# Altium PCB VESC_JLC.PcbDoc (part 2 of 3)
Units mm, origin at the board's own origin, x right, y up, seen from the top; angles counter-clockwise.
Board outline 74.1 x 118 mm, 2 copper layers (Component Side, Bottom Layer), stack 1.571 mm thick; 178 components, 173 nets, 901 pads, 567 vias.
Unrouted connection lines stored in the file: 10.
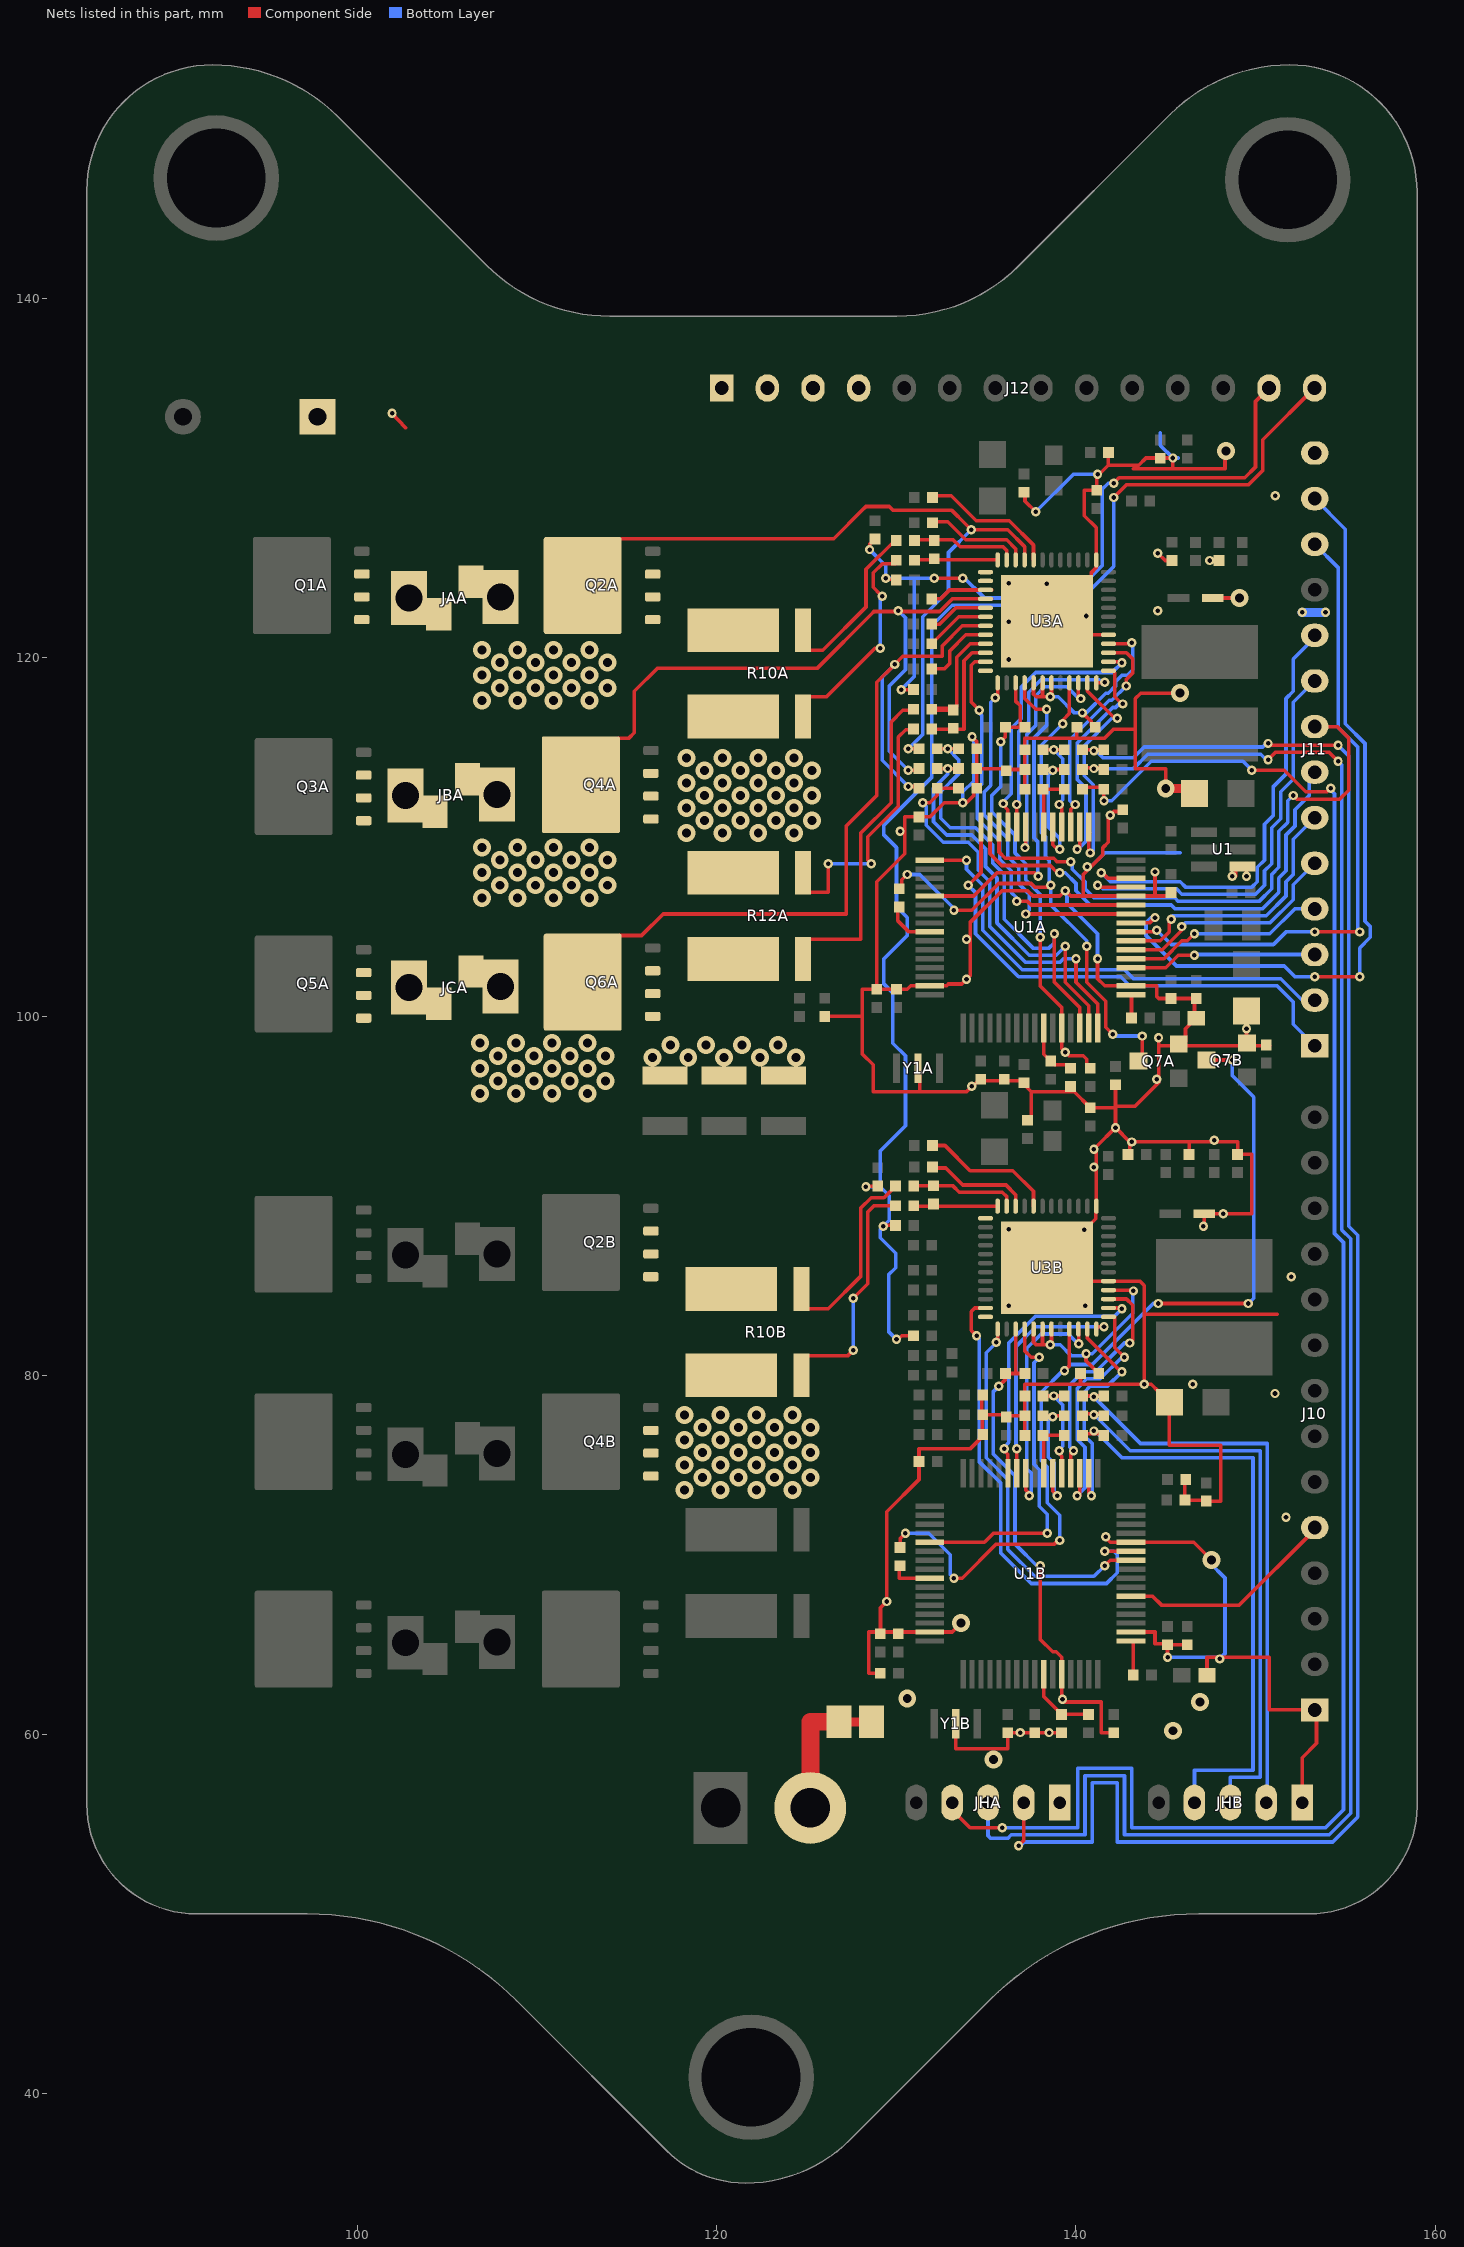
[diagram p2: the nets of this part, all layers, seen from the top]

## Via types
v1: diameter 0.52, hole 0.254, Component Side to Bottom Layer, tented both sides, 284 vias
v2: diameter 1, hole 0.5, Component Side to Bottom Layer, tented both sides, 283 vias

## Nets (pads, with @x,y where several pads share a name; then routed paths per layer and width w, separated by ;. In a path a pad name is that pad's centre, name@x,y a point inside that pad or via, vN(x,y) a via of type N, cw(c..) or ccw(c..) an arc to the next point about the centre after c; other vN are vias at no path point) (continued)
GND: C1A.2 C1B.2 C2A.2 C2B.2 C3A.2 C3B.2 C4A.2 C4B.2 C5A.2 C5B.2 C6A.2 C6B.2 C7A.2 C7B.2 C8A.2 C8B.2 C10A.2 C10B.2 C11A.2 C11B.2 C12A.1 C12B.1 C13A.1 C13B.1 C14A.1 C14B.1 C18A.2 C18B.2 C22A.1 C22B.1 C23A.1 C23B.1 C30A.2 C30B.2 C33A.2 C33B.2 C35A.1 C36A.1 C37A.1 C38A.2 C38B.2 C39.1 C40A.2 D1A.2 D1B.2 D3A.1 D3B.1 J10.1 J11.14 J12.1 J12.2 J12.3 J12.4 JB.1 JHA.1 JHB.1 pad.3 Q7A.2 Q7B.2 R6.1 R11.1 R12.1 R13.1 R20A.1 R20B.1 R22A.1 R22B.1 R24A.1 R24B.1 R33A.1 R33B.1 R36A.2 R36B.2 R40A.1 R40B.1 R41A.1 U1.1 U1A.18 U1A.28 U1A.63 U1B.18 U1B.28 U1B.63 U3A.0 U3A.1 U3A.41 U3B.0 U3B.1 U3B.41 Y1A.2 Y1B.2 | length 331.7
  Component Side w0.2: v1(101.9,133.6) 102.65,132.775 ; R11.1@126,99.992 128.092,99.992 ; C4A.2@128.9,101.708 128.9,107.5 130.46,109.06 130.46,111.108 C6A.2@131.26,111.108 131.868,111.108 132.66,111.9 v1(133.7,111.9) 133.9,111.9 134.3,112.3 R20A.1@134.3,112.532 ; C1B.2@129.092,63.4 128.46,63.4 128.46,65.7 U1B.63@131.86,65.7 133.1,65.7 133.43,66.03 133.6,65.86 v2(133.6,66.2) ; C4B.2@129.11,65.6 129.11,67.055 v1(129.455,67.4) 129.455,72.395 131.252,74.192 C6B.2@131.252,75.2 131.252,75.9 134.1,75.9 134.768,76.568 R22B.1@134.768,77.8 ; Y1A.2@131.3,96.9 131.3,95.8 ; Y1B.2@133.3,60.6 133.3,59.2 136.2,59.2 C2B.2@136.2,60.092 C3B.2@137.7,60.092 R40B.1@139.2,60.092 ; v1(133.9,102.065) 133.635,101.8 132.9,101.8 132.8,101.7 U1A.63@131.86,101.7 130.8,101.7 130.6,101.5 128.1,101.5 128.1,97.9 128.7,97.3 128.7,95.8 131.3,95.8 ; v1@134,102.1 133.935,102.1 134.1,102.265 134.1,105.223 135.877,107 137.3,107 137.6,106.7 139.1,106.7 v1(139.4,107) 139.7,106.7 140.4,106.7 ; v1(134.21,115.566) 134.468,115.308 R24A.1@134.468,114.9 R22A.1@134.468,113.8 ; R20A.1@134.468,112.7 R22A.1@134.468,113.8 ; R24B.1@134.75,78.618 134.75,77.8 C30B.2@135.984,77.8 ; C30A.2@135.984,113.8 R22A.1@134.468,113.8 ; C30B.2@136.11,77.674 136.186,77.75 C13B.1@137.152,77.75 ; C30A.2@136.11,113.674 136.186,113.75 C13A.1@137.152,113.75 ; U3B.0@136.197,83.937 138.26,86 U3B.0@138.385,86 ; U3A.0@136.197,119.937 138.26,122 U3A.0@138.385,122 ; C12B.1@137.152,76.65 C13B.1@137.152,77.75 ; C12A.1@137.152,112.65 C13A.1@137.152,113.75 ; 137.152,115.5 140.052,115.5 ; 137.16,115.5 137.152,115.492 C14A.1@137.152,114.85 C13A.1@137.152,113.75 ; C38A.2@137.16,129.092 137.16,128.7 v1(137.76,128.1) ; C38B.2@137.3,94.208 137.5,94.408 137.5,95.8 ; C23A.1@140.052,116 140.052,115.5 ; C23B.1@140.252,80.1 140.252,79.5 ; C18B.2@140.7,94.908 C18B.2@140.8,94.908 142.192,94.908 ; C18B.2@140.784,94.916 139.9,95.8 137.5,95.8 ; v1(141.2,103.2) 141.2,102.1 141.6,101.7 U1A.18@143.06,101.7 144.5,101.7 144.5,101.1 144.608,100.992 C8A.2@145.3,100.992 ; v1@141.6,71 141.9,70.7 U1B.28@143.06,70.7 146.56,70.7 v2(147.56,69.7) ; U3A.41@141.81,121.25 139.135,121.25 U3A.0@138.385,122 ; C18A.2@141.908,131.4 141.8,131.292 141.8,130.7 ; v1@142.2,93.7 v1(142.2,93.8) ; C5A.2@142.2,96.192 142.2,95 ; C11A.2@142.6,111.408 142.108,111.408 141.8,111.1 141.8,109.7 141.5,109.4 141.5,109 140.5,108 140.4,107.9 140.4,107.74 140.4,106.7 ; R33B.1@143,92.308 v1@143,93 ; U1B.18@143.06,65.7 144.4,65.7 144.4,65.05 144.952,65.05 145.1,64.902 145.1,64.44 v1@144.96,64.3 ; 143.2,116 142.1,116 141.6,115.5 140.052,115.5 ; 143.2,130.5 145.4,130.5 ; 144.4,106.8 v1(144.4,108.04) ; v1(144.56,125.8) 144.968,125.392 C22A.1@145.46,125.392 ; v1(144.6,98.8) 144.6,98.358 ; v2(145,112.7) 145,113.8 143.3,113.8 143.3,117.7 143.6,118 v2(145.8,118) ; C8B.2@145.1,64.992 R13.1@146.2,64.992 ; R41A.1@145.108,106.7 U1A.28@143.06,106.7 140.4,106.7 ; C8A.2@145.3,101.092 C8A.2@145.3,100.992 ; R41A.1@145.3,106.892 R41A.1@145.5,106.892 ; Q7A.2@145.6,98.575 146.1,98.575 146.1,99.3 146.6,99.8 146.6,100.892 146.5,100.992 C8A.2@145.3,100.992 ; C33A.2@145.9,112.7 C33A.2@146.1,112.9 ; C5B.2@146.068,74.2 C11B.2@146.068,73.05 C10B.2@147.202,73.05 ; R36B.2@146.3,92.308 146.3,93 ; C10A.2@146.692,101.1 C10A.2@146.796,100.996 ; D3B.1@146.85,89 D3B.1@147.15,89 ; v1@147.15,88.15 D3B.1@147.15,89 ; C10B.2@147.26,72.992 148.06,72.992 148.06,76.1 145.205,76.1 C33B.2@145.205,78.5 144.6,78.5 144.6,79.1 144.2,79.5 v1(143.8,79.5) ; D1B.2@147.3,63.3 147.3,64.3 147.9,64.3 v1(148,64.2) 148.1,64.3 150.76,64.3 150.76,61.36 J10.1@153.3,61.36 153.4,61.26 153.4,59.5 152.6,58.7 152.6,55.6 JHB.1@152.3,55.3 ; D3A.1@147.66,123.4 147.76,123.3 148.86,123.3 149.1,123.06 v2(149.1,123.3) ; v2@148.3,131.4 148.3,130.5 145.4,130.5 ; v1@148.9,107.8 148.9,108.4 148.85,108.35 U1.1@149.275,108.35 149.587,108.35 149.5,108.263 v1(149.5,107.8) ; C40A.2@149.5,100.305 149.5,98.5 Q7B.2@149.6,98.4 ; R12.1@150.8,98.358 144.6,98.358 ; 151.2,83.4 143.8,83.4 ; 131.3,95.8 133.9,95.8 v1(134.2,96.1) 134.25,96.1 134.55,96.4 136.9,96.4 137.5,95.8 ; C13B.1@137.152,77.75 C14B.1@137.152,78.85 137.152,79.5 140.252,79.5 ; U3B.0@138.385,86 141.1,88.715 141.1,89.39 U3B.1@141.135,89.425 141.135,92.735 v1(142.2,93.8) ; U3B.0@138.385,86 139.135,85.25 U3B.41@141.81,85.25 143.55,85.25 143.8,85 143.8,83.4 ; U3A.0@138.385,122 140.86,124.475 140.86,124.725 141.135,125 U3A.1@141.135,125.425 141.135,127.225 140.468,127.892 140.468,129.308 R33A.1@141.16,129.308 141.16,130.06 141.8,130.7 ; 140.252,79.5 v1(143.8,79.5) ; 141.8,130.7 143.5,130.7 143.9,131.1 v1(145.4,131.1) 145.4,130.5 ; v1(142.2,93.8) 142.2,95 ; v1(142.2,93.8) v1@143,93 ; 142.2,95 143.3,95 144.6,96.3 144.6,98.358 ; v1@143,93 146.3,93 ; v1(143.8,79.5) 143.8,83.4 ; 146.3,93 149,93 C22B.1@149,92.308 149.8,92.308 149.8,89 v1(148.2,89) D3B.1@147.15,89
  Component Side w0.5: pad.3@126.8,60.7 pad.3@128.6,60.7 ; v2(145,112.7) C33A.2@145.9,112.7
  Component Side w1: JB.1@125.2,55.9 125.2,60.7 pad.3@126.2,60.7
  Bottom Layer w0.2: JB.1@125.36,55.7 JB.1@125.86,56.2 ; v1(133.7,111.9) 133.7,112.5 134.3,113.1 134.3,115.476 v1(134.21,115.566) ; v1@136.235,83.85 v1(136.26,83.875) ; v1(137.76,128.1) 139.86,130.2 v1(141.2,130.2) ; v1@139.5,107 139.5,106.3 141.2,104.6 v1(141.2,103.2) ; v1@140.6,108.2 140.7,108.3 140.8,108.3 141.6,109.1 145.8,109.1 ; 144.7,132.5 144.7,131.8 v1(145.4,131.1) 145.7,131.1 ; v1(145.1,64.3) 147.9,64.3 v1(148,64.2) 148.3,64.5 148.3,68.71 v2@147.46,69.55
  Bottom Layer w0.5: v1(152.6,122.5) v1(153.9,122.5)
  other v1: 136.9,60.1 138.5,60.1 139.25,61.95 141.66,71 151.7,72.1 151.087,78.987 146.5,79.5 140.51,83.875 152,85.5 136.26,88.125 140.46,88.1 147.1,88.3 141,91.6 141,92.6 143.1,93 147.7,93.1 144.5,96.5 139.4,98 149.5,99.3 133.9,104.3 148.7,107.8 140.627,108.328 130.2,110.3 141.9,111.2 136.26,119.875 136.26,121.975 140.56,122.3 144.56,122.592 138.36,124.1 136.26,124.125 147.46,125.392 151.1,129
  other v2: 135.4,58.6 145.4,60.2 146.9,61.8 130.6,62 116.4,97.7 118.4,97.7 120.4,97.7 122.4,97.7 124.4,97.7 117.4,98.4 119.4,98.4 121.4,98.4 123.4,98.4 118.3,110.2 120.3,110.2 122.3,110.2 124.3,110.2 119.3,110.9 121.3,110.9 123.3,110.9 125.3,110.9 118.3,111.6 120.3,111.6 122.3,111.6 124.3,111.6 119.3,112.3 121.3,112.3 123.3,112.3 125.3,112.3 118.3,113 120.3,113 122.3,113 124.3,113 119.3,113.7 121.3,113.7 123.3,113.7 125.3,113.7 118.3,114.4 120.3,114.4 122.3,114.4 124.3,114.4 148.36,131.5
MA_AGND: C9A.2 C34A.2 R37A.2 U1A.12 U3A.27 | length 25.1
  Component Side w0.2: v1(135.8,115.3) 136.068,115.568 C34A.2@136.068,116.1 136.9,116.1 136.9,117.3 136.635,117.565 U3A.27@136.635,118.575 ; v1(138,104.4) 138,101.7 139.21,100.49 U1A.12@139.21,99.35 139.21,98.19 139.6,97.8 140.408,97.8 140.6,97.608 C9A.2@140.6,97.4
  Bottom Layer w0.2: v1(135.8,115.3) 135.8,112.8 135.3,112.3 135.3,111.4 136.6,110.1 136.6,109.1 137.2,108.5 137.2,107.6 138,106.8 v1(138,104.4)
MA_AN_IN: R38A.1 R40A.2 U1A.10 | length 3
  Component Side w0.2: U1A.10@138.21,99.35 138.21,97.89 138.8,97.3 R40A.2@139.5,97.3
MA_CURRENT_A: U1A.26 U3A.25 | length 20.2
  Component Side w0.2: v1(135.51,117.75) 135.635,117.875 U3A.25@135.635,118.575 ; v1(137.2,105.7) 137.3,105.8 137.4,105.7 U1A.26@143.06,105.7
  Bottom Layer w0.2: v1(135.51,117.75) 135.26,117.5 135.26,112.86 134.9,112.5 134.9,111.2 136.2,109.9 136.2,108.9 136.8,108.3 136.8,107.4 137.3,106.9 137.4,106.8 137.4,105.9 v1(137.2,105.7)
MA_CURRENT_B: U3A.24
MA_CURRENT_C: U1A.27 U3A.23 | length 21.7
  Component Side w0.2: v1(134.618,117.05) 134.16,117.508 134.16,119.55 134.36,119.75 U3A.23@134.96,119.75 ; v1(136.7,106.4) 137.3,106.4 137.5,106.2 U1A.27@143.06,106.2
  Bottom Layer w0.2: v1(134.618,117.05) 134.618,116.892 134.76,116.75 134.76,112.96 134.5,112.7 134.5,111.01 135.76,109.75 135.76,108.74 136.4,108.1 136.4,106.9 136.7,106.6 v1(136.7,106.4)
MA_DVDD: C23A.2 U3A.29 U3A.30 U3A.31 U3A.40 | length 13.5
  Component Side w0.2: U3A.29@137.635,118.575 137.635,117.95 137.785,117.8 138.135,117.8 ; U3A.30@138.135,118.575 138.135,117.8 ; U3A.31@138.635,118.575 138.635,117.725 v1(138.56,117.8) 138.135,117.8 ; v1(140.36,116.9) 140.86,116.4 140.86,116.208 C23A.2@141.068,116 ; U3A.40@141.81,120.75 v1@143.135,120.75
  Bottom Layer w0.2: v1(138.56,117.8) 139.018,117.8 139.918,116.9 v1(140.36,116.9) 140.56,116.9 141.66,118 141.8,118 142.2,118.4 142.2,118.64 142.56,119 142.86,119 143.16,119.3 143.16,120.74 v1(143.1,120.8)
MA_EN_GATE: R39A.2 U1A.57 | length 2.9
  Component Side w0.2: R39A.2@130.06,106.192 130.06,105.34 130.7,104.7 U1A.57@131.86,104.7
MA_EN_GATE_R: Q7A.3 R39A.1 U3A.33 | length 36.3
  Component Side w0.2: R39A.1@130.3,107.3 130.3,107.6 v1(130.6,107.9) ; v1(133.2,105.9) 134.2,105.9 135.7,107.4 137.5,107.4 137.7,107.2 138.36,107.2 138.46,107.3 v1(138.6,107.3) ; v1(139.26,116.3) 139.26,116.5 139.635,116.875 U3A.33@139.635,118.575 ; v1(140.6,103.9) 140.6,101.9 141.66,100.84 141.66,99.39 v1(142.05,99) ; Q7A.3@143.475,97.6 143.7,97.825 v1(143.7,98.9)
  Bottom Layer w0.2: v1(130.6,107.9) 131.3,107.9 133.3,105.9 v1(133.2,105.9) ; v1(139.26,116.3) 138.06,115.1 138.06,110.24 138.3,110 138.3,108.9 138.5,108.7 138.5,107.4 v1(138.6,107.3) ; v1(140.6,103.9) 140.6,104.2 138.6,106.2 v1@138.6,107.1 ; v1(142.05,99) 142.05,98.9 143.06,98.9 ; v1@143.56,98.9 143.06,98.9 ; v1(143.7,98.9) 143.06,98.9 ; v1@138.6,107.1 138.5,107.2 v1(138.6,107.3) ; v1@138.6,107.1 v1(138.6,107.3)
MA_ESTOP: J12.13 R7A.1 R8A.1 R9A.1 | length 42
  Component Side w0.2: v1@128.5,126.1 128.5,126.292 R7A.1@128.8,126.592 ; R7A.1@128.8,126.4 R7A.1@128.8,126.492 ; v1(129.4,124.4) 129.36,124.4 129.31,124.35 R8A.1@129.952,124.35 ; v1(130.26,118.2) R9A.1@130.952,118.2 ; v1(132.1,124.4) v1(133.7,124.4) ; v1(142.1,129.7) 142.4,130 149.4,130 150,130.6 150,134.25 J12.13@150.75,135
  Bottom Layer w0.2: v1(128.5,126) 129.4,125.1 v1(129.4,124.4) v1(132.1,124.4) ; v1(130.26,118.2) 131,118.94 131,124.4 ; v1@133.7,124.5 134.9,123.3 139.66,123.3 141.453,125.093 141.453,129.353 141.8,129.7 v1(142.1,129.7)
MA_H1: U1A.41 U3A.34 | length 13.9
  Component Side w0.2: v1(137.16,109.4) 137.194,109.4 137.202,109.392 137.202,110.542 U1A.41@137.21,110.55 ; U3A.34@140.135,118.575 140.135,117.625 140.16,117.6 v1(140.26,117.7)
  Bottom Layer w0.2: v1(137.16,109.4) 137.26,109.5 137.26,115.7 137.76,116.2 137.76,117.86 138.25,118.35 139.5,118.35 139.5,118.36 v1@140.11,117.75
MA_H2: U1A.42 U3A.36 | length 13.5
  Component Side w0.2: v1@136.644,111.95 136.7,111.894 v1(136.7,111.8) ; U1A.42@136.702,110.75 v1@136.702,111.892 ; U3A.36@141.135,118.575 141.465,118.575 141.6,118.44 v1(141.6,118.6)
  Bottom Layer w0.2: v1@136.66,111.95 136.7,111.91 v1(136.7,111.8) 136.7,111.802 136.798,111.9 136.8,111.898 136.8,115.84 137.36,116.4 137.36,118.06 138.05,118.75 141.29,118.75 141.6,118.44 v1(141.6,118.6)
MA_H3: U1A.43 U3A.38 | length 15.5
  Component Side w0.2: v1(135.952,111.85) 135.85,111.85 136.202,111.498 U1A.43@136.202,110.75 ; U3A.38@141.81,119.75 142.635,119.75 142.66,119.725 142.56,119.625 v1(142.56,119.7)
  Bottom Layer w0.2: v1(135.952,111.85) 135.952,111.952 136.4,112.4 136.4,116.04 136.96,116.6 136.96,118.36 137.75,119.15 142.01,119.15 v1(142.56,119.7)
MA_HALL1_IN: JHA.2 R15A.1 R18A.1 | length 104.2
  Component Side w0.2: v1(136.8,53.8) 137.1,54.1 JHA.2@137.1,56.2 ; R18A.1@140.368,114.85 R15A.1@141.452,114.85 ; v1@150.7,115.1 v1(154.6,115.1)
  Bottom Layer w0.2: v1(136.8,53.8) 136.8,53.7 137.1,54 140.9,54 140.9,57.3 142.3,57.3 142.3,54 154.3,54 155.7,55.4 155.7,87.8 155.2,88.3 155.2,114.5 v1(154.6,115.1) ; v1@140.993,114.8 v1(141,114.8) 141.1,114.8 141.5,114.4 143.2,114.4 143.8,115 148.8,115 150.4,115 150.6,115.2 v1(150.7,115.2)
MA_HALL2_IN: JHA.3 R14A.1 R17A.1 | length 103.8
  Component Side w0.2: R17A.1@140.268,113.85 R14A.1@141.352,113.85 ; v1(150.7,114.3) 151.1,114.7 154.1,114.7 v1(154.6,114.2)
  Bottom Layer w0.2: JHA.3@134.75,56.15 135.1,55.8 135.1,54.36 135.26,54.2 136.2,54.2 136.4,54.4 140.5,54.4 140.5,57.7 142.7,57.7 142.7,54.4 154.1,54.4 155.3,55.6 155.3,87.6 154.8,88.1 154.8,114 v1(154.6,114.2) ; v1(141,113.8) 143.2,113.8 144,114.6 150.3,114.6 150.6,114.3 v1(150.7,114.3)
MA_HALL3_IN: JHA.4 R13A.1 R16A.1 | length 103
  Component Side w0.2: JHA.4@132.75,56.15 134.1,54.8 v1(135.9,54.8) ; R16A.1@140.268,112.75 R13A.1@141.352,112.75 ; v1@141.552,112.008 R13A.1@141.552,112.65 ; v1(149.8,113.7) 151.6,113.7 152.8,112.5 154,112.5 v1(154.2,112.7)
  Bottom Layer w0.2: v1(135.9,54.8) 140.1,54.8 140.1,58.1 143.1,58.1 143.1,54.8 153.9,54.8 154.9,55.8 154.9,87.4 154.4,87.9 154.4,112 154.4,112.4 154.2,112.6 v1(154.2,112.7) ; v1(141.56,112) 142,112 144.2,114.2 149.3,114.2 v1(149.8,113.7)
MA_HALL_1: C14A.2 R18A.2 U1A.37 | length 5.9
  Component Side w0.2: C14A.2@138.168,114.85 v1(138.76,114.85) R18A.2@139.352,114.85 ; v1(139.06,111.8) 139.21,111.65 U1A.37@139.21,110.55
  Bottom Layer w0.2: v1(138.76,114.85) 139.26,114.35 139.26,112.058 139.002,111.8 v1(139.06,111.8)
MA_HALL_2: C13A.2 R17A.2 U1A.38 | length 7.8
  Component Side w0.2: C13A.2@138.168,113.75 R17A.2@139.352,113.75 ; U1A.38@138.702,110.75 138.702,109.558 138.96,109.3 v1(139.1,109.3)
  Bottom Layer w0.2: v1@138.768,113.85 138.7,113.782 v1(138.7,113.7) 138.7,113.682 138.46,113.442 138.46,110.54 139.1,109.9 v1(139.1,109.3)
MA_HALL_3: C12A.2 R16A.2 U1A.39 | length 3.3
  Component Side w0.2: C12A.2@138.168,112.65 C12A.2@138.21,112.65 ; U1A.39@138.21,110.55 C12A.2@138.21,112.65 ; R16A.2@139.352,112.65 C12A.2@138.21,112.65
MA_L1: U1A.34 U3A.35 | length 12.8
  Component Side w0.2: U3A.35@140.635,118.575 140.635,118.125 142.3,116.46 v1(142.3,116.6) ; U1A.34@140.76,110.2 140.71,110.15 140.71,109.33 140.8,109.24 v1(140.8,109.1)
  Bottom Layer w0.2: v1(140.8,109.1) 140.96,109.26 140.96,112.9 140.46,113.4 140.46,115.06 142,116.6 v1(142.3,116.6)
MA_L2: U1A.35 U3A.37 | length 14
  Component Side w0.2: v1(140.06,109.3) 140.11,109.3 140.16,109.25 140.21,109.3 140.202,109.308 U1A.35@140.202,110.75 ; U3A.37@141.81,119.25 142.05,119.25 142.16,119.14 142.16,117.8 142.6,117.36 v1(142.6,117.4)
  Bottom Layer w0.2: v1(140.06,109.3) 140.11,109.3 140.56,109.75 140.56,112.7 140.06,113.2 140.06,115.21 142.05,117.2 142.2,117.2 142.48,117.48 142.6,117.36 v1(142.6,117.4)
MA_L3: U1A.36 U3A.39 | length 12.8
  Component Side w0.2: U1A.36@139.702,110.45 139.702,111.542 v1(139.96,111.8) ; U3A.39@141.81,120.25 142.81,120.25 143.16,119.9 143.16,119.12 142.8,118.76 v1(142.8,118.4)
  Bottom Layer w0.2: v1(139.96,111.8) 139.86,111.8 139.66,112 139.66,115.4 141.86,117.6 142,117.6 v1(142.8,118.4)
MA_LED_GREEN: R32A.2 U1A.17 | length 1.3
  Component Side w0.2: R32A.2@143.092,99.9 U1A.17@143.092,101.168
MA_MISO_ADC_EXT2: J11.5 U1A.22 | length 12.8
  Component Side w0.2: U1A.22@143.06,103.7 144.8,103.7 145.9,104.8 v1(145.9,105)
  Bottom Layer w0.2: v1(145.9,105) 146.1,105.2 150.8,105.2 152.1,106.5 152.1,107.32 J11.5@153.3,108.52
MA_NFAULT: U1A.53 U3A.28 | length 18.7
  Component Side w0.2: U1A.53@131.86,106.7 134.3,106.7 135.3,107.7 135.6,108 137.7,108 v1(137.9,107.8) ; U3A.28@137.135,118.575 137.135,117.725 137.76,117.1 v1(138.36,117.1)
  Bottom Layer w0.2: v1(137.9,107.8) 137.86,107.84 137.86,109.74 137.66,109.94 137.66,115.5 138.36,116.2 v1(138.36,117.1)
MA_PA_AGND: R10A.1 R26A.2 | length 13.1
  Component Side w0.2: R10A.1@124.9,117.8 126.1,117.8 128.3,120 ; R10A.1@125,116.7 R10A.1@125,117.8 ; 127.8,119.5 128.3,120 ; v1(129.1,120.5) 128.8,120.5 128.3,120 ; v1@129.1,123.5 128.7,123.9 128.7,124.7 129.2,125.2 129.952,125.2 R26A.2@129.952,125.45
  Bottom Layer w0.2: v1(129.1,120.5) 129.1,123.3 v1(129.2,123.4)
MA_PA_AGND_F: C15A.1 R26A.1 U3A.12 | length 4.7
  Component Side w0.2: R26A.1@130.968,125.425 U3A.12@135.635,125.425
MA_PA_HI: R1A.1 U3A.8 | length 7.4
  Component Side w0.2: R1A.1@132.21,129 133.052,129 134.444,127.608 136.277,127.608 137.635,126.25 U3A.8@137.635,125.425
MA_PA_LO: R2A.1 U3A.10 | length 5.9
  Component Side w0.2: R2A.1@131.96,127.55 132.85,127.55 133.85,126.55 136.135,126.55 136.635,126.05 U3A.10@136.635,125.425
MA_PA_SOURCE: Q2A.1 Q2A.2 Q2A.3 R10A.2 R25A.2 | length 10.8
  Component Side w0.2: R10A.2@124.5,122 124.5,120.4 125.9,120.4 128.3,122.8 128.3,124.898 R25A.2@129.952,126.55
MA_PA_SOURCE_F: C15A.2 R25A.1 U3A.11 | length 5.9
  Component Side w0.2: R25A.1@130.968,126.55 133.15,126.55 133.55,126.15 135.935,126.15 136.135,125.95 U3A.11@136.135,125.425
MA_PB_AGND: Q4A.1 Q4A.2 Q4A.3
MA_PB_AGND_F: U3A.13
MA_PB_HI: R3A.1 U3A.17 | length 3.4
  Component Side w0.2: R3A.1@131.968,121.85 132.41,121.85 133.31,122.75 U3A.17@134.96,122.75
MA_PB_LO: R4A.1 U3A.15 | length 3.4
  Component Side w0.2: R4A.1@132.068,123.25 132.45,123.25 132.95,123.75 U3A.15@135.31,123.75
MA_PB_SOURCE_F: U3A.14
MA_PC4: J11.12 U1A.24 | length 36
  Component Side w0.2: U1A.24@143.06,104.7 144.4,104.7 v1(144.5,104.8) ; v1(153.3,104.7) v1(155.8,104.7)
  Bottom Layer w0.2: v1(144.5,104.8) 145.3,104 151,104 151.7,104.7 v1(153.3,104.7) ; J11.12@153.3,126.3 154.6,125 154.6,116.1 155.7,115 155.7,104.8 v1(155.8,104.7)
MA_PC5: J11.13 U1A.25 | length 43.9
  Component Side w0.2: U1A.25@143.06,105.2 144.1,105.2 v1(144.4,105.5) ; v1(153.3,102.2) v1(155.8,102.2) v1@155.9,102.3
  Bottom Layer w0.2: v1(144.4,105.5) 144.2,105.5 143.9,105.2 143.9,104.5 145.6,102.8 151.6,102.8 152.2,102.2 v1@153.2,102.2 ; J11.13@153.3,128.84 155,127.14 155,116.3 156.1,115.2 156.1,105.3 156.4,105 156.4,104.4 155.8,103.8 v1(155.8,102.2)
MA_PC_AGND: R12A.2 R30A.2 | length 16.5
  Component Side w0.2: v1(126.2,108.5) 126.2,106.9 R12A.2@124.8,106.9 ; v1(128.6,108.5) 128.4,108.7 128.4,110 130.1,111.7 130.1,115.556 130.51,115.966 R30A.2@130.952,115.966 ; R12A.2@124.8,106.9 R12A.2@124.8,108 R12A.2@124.8,106.9
  Bottom Layer w0.2: v1(126.2,108.5) v1(128.6,108.5)
MA_PC_AGND_F: C17A.1 R30A.1 U3A.22 | length 7
  Component Side w0.2: R30A.1@131.968,116 133.76,116 133.76,118.15 133.76,119.8 134.21,120.25 U3A.22@134.96,120.25
MA_PC_HI: R5A.1 U3A.18 | length 3.6
  Component Side w0.2: R5A.1@131.968,120.75 133.468,122.25 U3A.18@134.96,122.25
MA_PC_LO: R6A.1 U3A.20 | length 4.2
  Component Side w0.2: R6A.1@131.968,119.35 132.66,119.35 132.96,119.65 132.96,120.35 133.86,121.25 U3A.20@134.96,121.25
MA_PC_SOURCE: Q6A.1 Q6A.2 Q6A.3 R12A.1 R29A.2 | length 17.6
  Component Side w0.2: R12A.1@124.7,104.3 128,104.3 128,110.2 129.7,111.9 129.7,116.398 130.352,117.05 R29A.2@130.96,117.05
MA_PC_SOURCE_F: C17A.2 R29A.1 U3A.21 | length 7
  Component Side w0.2: R29A.1@132.068,117.05 C17A.2@133.168,117.05 ; R29A.1@132.16,117.158 133.268,117.158 133.36,117.25 133.36,120 134.11,120.75 U3A.21@134.96,120.75
MA_PHASE_A: JAA.1 Q1A.1 Q1A.2 Q1A.3 Q2A.5 Q2A.6 Q2A.7 Q2A.8 Q2A.9@112.52,124 R23A.2 U3A.9 | length 39.2
  Component Side w0.2: 114.7,126.6 126.5,126.6 128.1,128.2 128.3,128.4 129.6,128.4 129.8,128.2 133.06,128.2 133.852,127.408 v1(134.16,127.1) 136.202,127.1 137.135,126.167 U3A.9@137.135,125.425 ; v1@130.502,114.9 v1(130.66,114.9) R23A.2@131.252,114.9
  Bottom Layer w0.2: v1(130.66,114.9) 131.46,115.7 131.46,122.26 132.9,123.7 132.9,125.84 v1(134.16,127.1)
  other v2: 106.9,117.6 108.9,117.6 110.9,117.6 112.9,117.6 107.9,118.3 109.9,118.3 111.9,118.3 113.9,118.3 106.9,119 108.9,119 110.9,119 112.9,119 107.9,119.7 109.9,119.7 111.9,119.7 113.9,119.7 106.9,120.4 108.9,120.4 110.9,120.4 112.9,120.4
MA_PHASE_B: JBA.1 Q3A.1 Q3A.2 Q3A.3 Q4A.5 Q4A.6 Q4A.7 Q4A.8 Q4A.9@112.42,112.9 R21A.2 U3A.16 | length 35.9
  Component Side w0.2: Q4A.9@114.5,115.5 115.1,115.5 115.4,115.8 115.4,118.1 116.7,119.4 125.6,119.4 128.6,122.4 128.75,122.55 132.41,122.55 133.11,123.25 U3A.16@135.31,123.25 ; v1(130.66,113.7) 131.152,113.7 R21A.2@131.252,113.8
  Bottom Layer w0.2: v1(130.1,122.6) 130.5,122.2 130.5,119.3 129.6,118.4 129.6,114.76 v1(130.66,113.7)
  other v2: 106.9,106.6 108.9,106.6 110.9,106.6 112.9,106.6 107.9,107.3 109.9,107.3 111.9,107.3 113.9,107.3 106.9,108 108.9,108 110.9,108 112.9,108 107.9,108.7 109.9,108.7 111.9,108.7 113.9,108.7 106.9,109.4 108.9,109.4 110.9,109.4 112.9,109.4
MA_PHASE_C: JCA.1 Q5A.1 Q5A.2 Q5A.3 Q6A.5 Q6A.6 Q6A.7 Q6A.8 Q6A.9@112.52,101.9 R19A.2 U3A.19 | length 44.9
  Component Side w0.2: Q6A.9@112.52,103.22 Q6A.9@114.52,103.22 ; Q6A.9@114.5,104.4 114.6,104.5 115.8,104.5 117,105.7 127.2,105.7 127.2,110.6 128.45,111.85 128.9,112.3 128.9,118.6 v1(129.9,119.6) 130.35,120.05 132.56,120.05 132.56,120.65 133.66,121.75 U3A.19@134.96,121.75 ; v1(130.66,112.8) 131.152,112.8 R19A.2@131.252,112.7
  Bottom Layer w0.2: v1(129.9,119.6) 129.2,118.9 129.2,114.26 v1(130.66,112.8) v1@130.6,112.8
  other v2: 106.8,95.7 108.8,95.7 110.8,95.7 112.8,95.7 107.8,96.4 109.8,96.4 111.8,96.4 113.8,96.4 106.8,97.1 108.8,97.1 110.8,97.1 112.8,97.1 107.8,97.8 109.8,97.8 111.8,97.8 113.8,97.8 106.8,98.5 108.8,98.5 110.8,98.5 112.8,98.5
MA_RX: J11.10 U1A.30 | length 26.1
  Component Side w0.2: v1@141.43,108.03 141.76,107.7 U1A.30@143.06,107.7
  Bottom Layer w0.2: v1(141.4,108) 141.9,107.5 145.8,107.5 146.1,107.2 149.8,107.2 150.1,107.5 150.1,108.3 150.5,108.7 150.5,110.7 151,111.2 151,112.8 151.7,113.5 151.7,117.7 152.1,118.1 152.1,119.9 J11.10@153.5,121.3
MA_SCK_ADC_EXT: J11.4 U1A.21 | length 12
  Component Side w0.2: U1A.21@143.06,103.2 144.9,103.2 145.9,104.2 146.2,104.2 v1(146.6,104.6)
  Bottom Layer w0.2: v1(146.6,104.6) 150.8,104.6 152.18,105.98 J11.4@152.8,105.98 ; J11.4@152.8,105.74 J11.4@152.8,105.98 ; J11.4@152.8,106.3 J11.4@152.8,105.98 ; J11.4@153.3,105.98 J11.4@152.8,105.98
MA_SCL: J11.6 U1A.23 | length 15.1
  Component Side w0.2: U1A.23@143.06,104.2 144.7,104.2 145.2,104.7 145.2,105.3 v1(145.3,105.4)
  Bottom Layer w0.2: v1(145.3,105.4) 145.3,105.5 145.4,105.6 150.6,105.6 151.7,106.7 151.7,107.5 152.1,107.9 152.1,109.86 J11.6@153.3,111.06
MA_SDA: J11.3 U1A.20 | length 10.5
  Component Side w0.2: U1A.20@143.06,102.7 145,102.7 145.7,103.4 v1(146.6,103.4)
  Bottom Layer w0.2: v1(146.6,103.4) 146.64,103.44 J11.3@153.3,103.44
MA_SWDCLK: J11.2 U1A.49 | length 26.4
  Component Side w0.2: U1A.49@131.86,108.7 133.35,108.7 v1(133.9,108.7)
  Bottom Layer w0.2: v1(133.9,108.7) 133.9,108.2 134.8,107.3 134.8,104.8 137,102.6 142.7,102.6 143.2,102.1 151.4,102.1 152.6,100.9 J11.2@153.3,100.9
MA_SWDIO: J11.1 U1A.46 | length 28.6
  Component Side w0.2: v1(134,107.3) 134.71,108.01 U1A.46@134.71,110.55
  Bottom Layer w0.2: v1(134,107.3) 134.4,106.9 134.4,104.6 136.8,102.2 142.5,102.2 143,101.7 151.2,101.7 152.1,100.8 152.1,99.56 J11.1@153.3,98.36
MA_TX: J11.9 U1A.29 | length 25
  Component Side w0.2: v1(141.2,107.3) 141.3,107.2 U1A.29@143.06,107.2
  Bottom Layer w0.2: v1(141.2,107.3) 141.3,107.3 141.5,107.1 145.6,107.1 145.9,106.8 150,106.8 150.5,107.3 150.5,108.1 150.9,108.5 150.9,110.5 151.4,111 151.4,112.5 152.1,113.2 152.1,117.5 J11.9@153.65,119.05 ; J11.9@152.8,118.3 J11.9@152.8,118.6
MA_USB_DM: J11.8 U1A.44 | length 32.6
  Component Side w0.2: U1A.44@135.71,110.55 135.71,109.15 136.06,108.8 138.76,108.8 138.96,108.6 v1(139.7,108.6) ; v1(152.1,112.3) 152.3,112.1 154.7,112.1 155.2,112.6 155.2,115.5 154.56,116.14 J11.8@153.3,116.14
  Bottom Layer w0.2: v1(139.7,108.6) 139.8,108.5 139.8,108.2 140.5,107.5 140.5,107.1 141,106.6 145.5,106.6 145.7,106.4 150.2,106.4 150.9,107.1 150.9,107.9 151.3,108.3 151.3,110.3 151.8,110.8 151.8,112 v1(152.1,112.3)
MA_USB_DP: J11.7 U1A.45 | length 27.3
  Component Side w0.2: U1A.45@135.21,110.55 135.21,109.05 135.86,108.4 138.56,108.4 138.96,108 v1(139.1,108)
  Bottom Layer w0.2: v1(139.1,108) 139.4,108 140,107.4 140,107 140.8,106.2 145.3,106.2 145.5,106 150.4,106 151.3,106.9 151.3,107.7 151.7,108.1 151.7,110.1 152.2,110.6 152.2,111.5 153,112.3 153,113.1 153.45,113.55 J11.7@153.45,113.85
MA_VOLTAGE_A: R23A.1 R24A.2 U1A.14 | length 23.8
  Component Side w0.2: R23A.1@132.218,114.866 132.252,114.9 v1(132.86,114.9) 133.418,114.9 133.452,114.866 R24A.2@133.452,114.9 ; v1(138.8,104.6) 138.96,104.6 138.8,104.44 138.8,101.9 140.21,100.49 U1A.14@140.21,99.45
  Bottom Layer w0.2: v1(132.86,114.9) 133.46,114.3 133.46,113.5 132.46,112.5 132.46,111.04 133,110.5 134.4,110.5 135.36,109.54 135.36,108.54 136,107.9 136,105.4 137.6,103.8 138.5,103.8 138.8,104.1 v1(138.8,104.6)
MA_VOLTAGE_B: R21A.1 R22A.2 U1A.15 | length 22.5
  Component Side w0.2: R21A.1@132.218,113.766 132.252,113.8 R21A.1@132.268,113.8 v1(132.86,113.8) 133.418,113.8 133.452,113.766 R22A.2@133.452,113.8 ; v1(139.4,103.9) 139.56,103.9 139.4,103.74 139.4,101.9 140.71,100.59 U1A.15@140.71,99.45
  Bottom Layer w0.2: v1(132.86,113.8) 132.86,113.5 132.06,112.7 132.06,110.84 132.8,110.1 134.2,110.1 134.96,109.34 134.96,108.34 135.6,107.7 135.6,105.2 137.4,103.4 138.9,103.4 v1(139.4,103.9)
MA_VOLTAGE_C: R19A.1 R20A.2 U1A.16 | length 21.9
  Component Side w0.2: v1(131.46,111.9) 131.86,111.9 132.268,112.308 R19A.1@132.268,112.7 133.418,112.7 133.452,112.666 R20A.2@133.452,112.7 ; R19A.1@132.218,112.666 132.252,112.7 R19A.1@132.26,112.692 ; v1(140,103.2) 140,101.9 141.21,100.69 U1A.16@141.21,99.45
  Bottom Layer w0.2: v1(131.46,111.9) 131.66,111.7 131.66,110.64 132.6,109.7 134,109.7 134.56,109.14 134.56,108.14 135.2,107.5 135.2,105 137.2,103 139.1,103 139.3,103.2 v1(140,103.2)
MB_AGND: C9B.2 C34B.2 R37B.2 U1B.12 U3B.27 | length 28.5
  Component Side w0.2: v1(135.7,79.4) 136.068,79.768 C34B.2@136.068,80.1 R37B.2@137.152,80.1 ; 136.635,80.165 U3B.27@136.635,82.575 ; v1(138,69.4) 138,65.3 138.7,64.6 138.9,64.6 139.21,64.29 U1B.12@139.21,63.35 139.21,61.99 139.4,61.8 141.4,61.8 141.4,60.092 C9B.2@142.3,60.092
  Bottom Layer w0.2: v1(135.7,79.4) 135.4,79.1 135.4,75.6 136.6,74.4 136.6,70.6 v1@137.9,69.3
MB_AN_IN: R38B.1 R40B.2 U1B.10 | length 4.3
  Component Side w0.2: U1B.10@138.2,63.35 138.2,62.108 R40B.2@139.2,61.108 R38B.1@140.8,61.108
MB_CURRENT_A: U1B.26 U3B.25 | length 21
  Component Side w0.2: v1(135.55,81.85) 135.55,81.84 135.61,81.9 135.635,81.875 U3B.25@135.635,82.575 ; v1(141.6,69.4) 141.9,69.7 U1B.26@143.06,69.7
  Bottom Layer w0.2: v1(135.55,81.85) 135.55,81.81 135,81.26 135,75.4 136.2,74.2 136.2,70.3 137.7,68.8 141,68.8 v1(141.6,69.4)
MB_CURRENT_B: U3B.24
MB_CURRENT_C: U1B.27 U3B.23 | length 25.7
  Component Side w0.2: v1(134.46,82.2) 134.16,82.5 134.16,83.55 134.36,83.75 U3B.23@134.96,83.75 ; v1(141.6,70.2) U1B.27@143.06,70.2
  Bottom Layer w0.2: v1(134.46,82.2) 134.6,82.06 134.6,75.2 135.8,74 135.8,70.1 137.5,68.4 141.7,68.4 142.3,69 142.3,70 142.1,70.2 v1(141.6,70.2)
MB_DVDD: C23B.2 U3B.29 U3B.30 U3B.31 U3B.40 | length 13.3
  Component Side w0.2: U3B.29@137.635,82.575 137.635,81.85 137.772,81.712 138.135,81.712 ; U3B.30@138.135,82.575 138.135,81.712 ; v1@138.447,81.6 138.547,81.7 v1(138.56,81.7) ; v1@138.447,81.712 138.135,81.712 ; v1@138.635,81.787 U3B.31@138.635,82.575 ; v1(140.56,81.2) 140.56,80.808 C23B.2@141.268,80.1 ; U3B.40@141.81,84.75 v1@143.15,84.75
  Bottom Layer w0.2: v1(138.56,81.7) 139.118,81.7 139.718,81.1 140.46,81.1 v1(140.56,81.2) 140.9,81.2 143.16,83.46 143.16,84.725 143.185,84.7 v1(143.2,84.7)
MB_EN_GATE: R39B.2 U1B.57 | length 2.1
  Component Side w0.2: R39B.2@130.16,69.14 130.16,68.7 U1B.57@131.86,68.7
MB_EN_GATE_R: Q7B.3 R39B.1 U3B.33 | length 52.4
  Component Side w0.2: R39B.1@130.2,70.408 130.2,70.9 v1(130.5,71.2) ; v1(133.2,68.7) 133.66,68.7 135.56,70.6 138.8,70.6 139,70.8 v1(139.1,70.8) ; v1(139.36,80.25) 139.635,80.525 U3B.33@139.635,82.575 ; v1(144.58,84) v1(149.6,84) ; Q7B.3@147.31,97.565 v1(148.7,97.565)
  Bottom Layer w0.2: v1(130.5,71.2) 131.8,71.2 133,70 133,68.9 v1(133.2,68.7) ; v1(139.1,70.8) 139.1,72.2 138.4,72.9 138.4,74.9 138.06,75.24 138.06,79.06 139.3,80.3 v1@139.41,80.3 ; v1(139.36,80.25) v1@139.41,80.3 ; v1(144.58,84) 144.3,84 140.9,80.6 139.71,80.6 v1@139.41,80.3 ; v1(148.7,97.565) 148.7,96.7 149.9,95.5 149.9,84.3 v1(149.6,84)
MB_ESTOP: J12.14 R7B.1 R8B.1 R9B.1 | length 77.3
  Component Side w0.2: v1@128.342,90.542 R7B.1@128.952,90.542 ; v1@129.31,88.35 R8B.1@129.952,88.35 ; v1(130,82) 130.1,82 130.3,82.2 R9B.1@130.952,82.2 ; v1(142.1,128.9) 142.8,129.6 149.6,129.6 150.4,130.4 150.4,132.11 J12.14@153.29,135
  Bottom Layer w0.2: v1(128.3,90.5) 129.1,90.5 ; v1(130,82) 129.56,82.44 129.56,85.6 129.96,86 129.96,86.8 129.1,87.66 129.1,88.14 v1(129.26,88.3) 129.6,88.64 129.6,90 129.1,90.5 ; 131.949,113.3 130,111.351 129.3,110.651 129.3,110.1 130,109.4 130,106.1 130.6,105.5 130.6,104.5 129.3,103.2 129.3,101.8 129.8,101.3 129.8,98.5 130.5,97.8 130.5,93.9 129.1,92.5 129.1,90.5 ; 131.96,113.3 131.96,121.76 133.1,122.9 139.94,122.9 142.1,125.06 v1(142.1,128.9)
MB_H1: U1B.41 U3B.34 | length 14.2
  Component Side w0.2: U1B.41@137.21,74.55 137.202,74.542 137.202,73.608 137.46,73.35 137.41,73.3 v1(137.4,73.3) ; U3B.34@140.135,82.575 140.16,82.55 v1(140.16,81.75)
  Bottom Layer w0.2: v1@137.26,73.4 137.36,73.3 v1(137.4,73.3) 137.5,73.4 137.5,74.56 137.26,74.8 137.26,81.5 138.06,82.3 139.56,82.3 v1@140.11,81.75
MB_H2: U1B.42 U3B.36 | length 13
  Component Side w0.2: v1@136.644,75.95 136.7,75.894 v1(136.7,75.9) ; U1B.42@136.702,74.75 v1@136.702,75.892 ; U3B.36@141.135,82.575 141.26,82.7 v1(141.56,82.7)
  Bottom Layer w0.2: v1@136.66,75.95 136.71,75.9 v1(136.7,75.9) 136.7,75.89 136.66,75.85 136.66,81.6 137.76,82.7 v1(141.56,82.7)
MB_H3: U1B.43 U3B.38 | length 15.2
  Component Side w0.2: v1(136,75.9) 135.994,75.9 135.952,75.858 136.202,75.608 U1B.43@136.202,74.75 ; U3B.38@141.81,83.75 v1@142.635,83.75
  Bottom Layer w0.2: v1(136,75.9) 136,76 136.26,76.26 136.26,81.8 137.76,83.3 142.16,83.3 v1(142.56,83.7)
MB_HALL1_IN: JHB.2 R15B.1 R18B.1 | length 32.7
  Component Side w0.2: R18B.1@140.368,78.85 R15B.1@141.452,78.85
  Bottom Layer w0.2: v1(141,78.8) 141,78.793 143.593,76.2 150.66,76.2 150.66,55.94 150.3,55.94 JHB.2@150.1,55.74
MB_HALL2_IN: JHB.3 R14B.1 R17B.1 | length 33.1
  Component Side w0.2: R17B.1@140.268,77.85 R14B.1@141.352,77.85
  Bottom Layer w0.2: v1(141,77.8) 141.018,77.8 143.018,75.8 150.26,75.8 150.26,57.6 148.6,57.6 148.6,56.24 JHB.3@148.1,55.74
MB_HALL3_IN: JHB.4 R13B.1 R16B.1 | length 33.8
  Component Side w0.2: R16B.1@140.268,76.75 R13B.1@141.352,76.75
  Bottom Layer w0.2: v1(141,76.9) 141,76.94 141.01,76.95 142.56,75.4 149.86,75.4 149.86,58 146.6,58 146.6,56.24 JHB.4@146.1,55.74
MB_HALL_1: C14B.2 R18B.2 U1B.37 | length 6.1
  Component Side w0.2: C14B.2@138.168,78.85 v1(138.76,78.85) R18B.2@139.352,78.85 ; v1(139.06,75.8) 138.91,75.8 139.21,75.5 U1B.37@139.21,74.55
  Bottom Layer w0.2: v1(138.76,78.85) 139.26,78.35 139.26,76.042 139.018,75.8 v1(139.06,75.8)
MB_HALL_2: C13B.2 R17B.2 U1B.38 | length 7.7
  Component Side w0.2: C13B.2@138.168,77.75 R17B.2@139.352,77.75 ; U1B.38@138.702,74.55 U1B.38@138.702,74.75 ; U1B.38@138.71,74.55 138.71,73.55 v1(138.96,73.3)
  Bottom Layer w0.2: v1@138.768,77.85 138.7,77.782 v1(138.7,77.7) 138.7,77.682 138.46,77.442 138.46,75.44 138.8,75.1 138.8,73.36 138.86,73.3 v1(138.96,73.3)
MB_HALL_3: C12B.2 R16B.2 U1B.39 | length 3.3
  Component Side w0.2: C12B.2@138.168,76.65 R16B.2@139.352,76.65 ; U1B.39@138.21,74.55 C12B.2@138.21,76.708
MB_L1: U1B.34 U3B.35 | length 13
  Component Side w0.2: U3B.35@140.635,82.575 140.635,82.075 v1@142.51,80.2 ; v1@140.71,73.45 U1B.34@140.71,74.55
  Bottom Layer w0.2: v1@140.76,73.4 140.9,73.26 140.9,76.2 140.46,76.64 140.46,79.06 140.8,79.4 141.76,79.4 v1(142.56,80.2)
  other v1: 140.86,73.3
MB_L2: U1B.35 U3B.37 | length 14.4
  Component Side w0.2: v1(140.06,73.3) 140.194,73.3 140.202,73.308 U1B.35@140.202,74.75 ; v1(142.7,81) 142.16,81.54 U3B.37@142.16,83.25 ; U3B.37@142.16,83.25 U3B.37@141.81,83.25 U3B.37@142.16,83.25
  Bottom Layer w0.2: v1(140.06,73.3) 140.5,73.74 140.5,76 140.06,76.44 140.06,79.26 140.6,79.8 141.36,79.8 142.56,81 v1(142.7,81)
MB_L3: U1B.36 U3B.39 | length 12.9
  Component Side w0.2: U1B.36@139.702,74.45 v1@139.702,75.683 ; U3B.39@141.81,84.25 142.81,84.25 143.16,83.9 143.16,81.96 v1(143,81.8)
  Bottom Layer w0.2: v1(139.86,75.8) 139.66,76 139.66,79.46 140.4,80.2 141.1,80.2 142.51,81.61 142.7,81.8 v1(143,81.8)
MB_LED_GREEN: R32B.2 U1B.17 | length 1.8
  Component Side w0.2: R32B.2@143.192,63.3 U1B.17@143.192,65.068
MB_MISO_ADC_EXT2: J10.5 U1B.22 | length 12
  Component Side w0.2: U1B.22@143.06,67.7 144.26,67.7 144.76,67.2 149.1,67.2 J10.5@153.2,71.3
MB_NFAULT: U1B.53 U3B.28 | length 19.2
  Component Side w0.2: U1B.53@131.86,70.7 134.9,70.7 135.4,71.2 v1(138.4,71.2) ; U3B.28@137.135,82.575 137.135,81.365 137.5,81 v1(137.96,81)
  Bottom Layer w0.2: v1(137.96,81) 137.66,80.7 137.66,75.04 137.96,74.74 137.96,72.7 138.4,72.26 v1(138.4,71.2)
MB_PA_AGND: R10B.1 R26B.2 | length 13
  Component Side w0.2: R10B.1@124.5,81.1 127.3,81.1 v1(127.6,81.4) ; v1(127.6,84.3) 128.4,85.1 128.4,89.1 128.75,89.45 R26B.2@129.952,89.45
  Bottom Layer w0.2: v1(127.6,81.4) v1(127.6,84.3)
MB_PA_AGND_F: C15B.1 R26B.1 U3B.12 | length 4.6
  Component Side w0.2: R26B.1@130.993,89.425 U3B.12@135.635,89.425
MB_PA_HI: R1B.1 U3B.8 | length 7.6
  Component Side w0.2: R1B.1@131.96,92.8 132.7,92.8 134.1,91.4 136.485,91.4 137.635,90.25 U3B.8@137.635,89.425
MB_PA_LO: R2B.1 U3B.10 | length 5.9
  Component Side w0.2: R2B.1@131.96,91.55 132.75,91.55 133.7,90.6 136.1,90.6 136.635,90.065 U3B.10@136.635,89.425
MB_PA_SOURCE: Q2B.1 Q2B.2 Q2B.3 R10B.2 R25B.2 | length 10.4
  Component Side w0.2: R10B.2@124.6,83.7 126.2,83.7 128,85.5 128,89.3 128.6,89.9 129.302,89.9 R25B.2@129.952,90.55
MB_PA_SOURCE_F: C15B.2 R25B.1 U3B.11 | length 5.9
  Component Side w0.2: R25B.1@130.968,90.55 133.15,90.55 133.5,90.2 135.9,90.2 136.135,89.965 U3B.11@136.135,89.425
MB_PB_AGND: Q4B.1 Q4B.2 Q4B.3
  other v2: 118.2,73.6 120.2,73.6 122.2,73.6 124.2,73.6 119.2,74.3 121.2,74.3 123.2,74.3 125.2,74.3 118.2,75 120.2,75 122.2,75 124.2,75 119.2,75.7 121.2,75.7 123.2,75.7 125.2,75.7 118.2,76.4 120.2,76.4 122.2,76.4 124.2,76.4 119.2,77.1 121.2,77.1 123.2,77.1 125.2,77.1 118.2,77.8 120.2,77.8 122.2,77.8 124.2,77.8
MB_PB_AGND_F: U3B.13